# Altium PCB WikiToy.PcbDoc
Units mm, origin at the board's own origin, x right, y up, seen from the top; angles counter-clockwise.
Board outline 99.96 x 99.96 mm, 2 copper layers (Top Layer, Bottom Layer); 1 components, 0 nets, 39 pads, 0 vias.
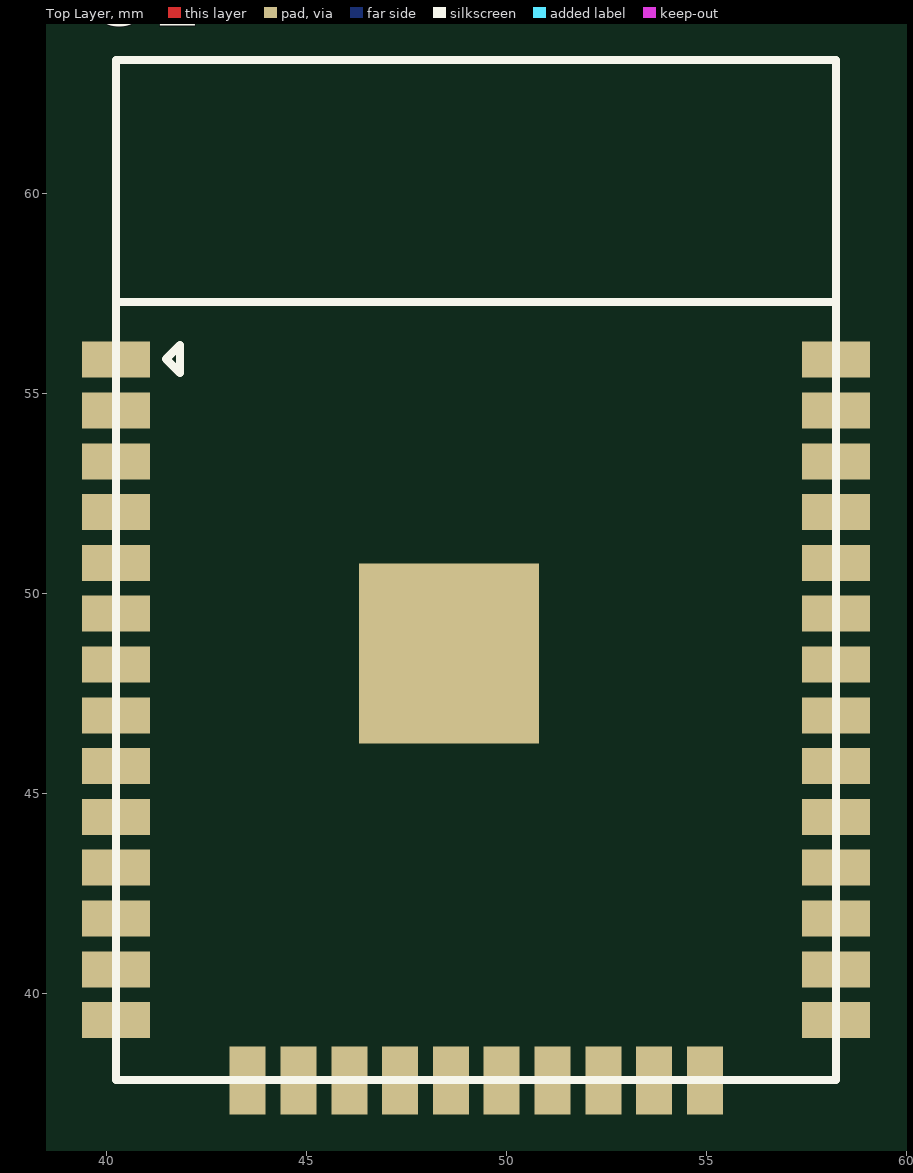
[diagram p0: Top Layer view]
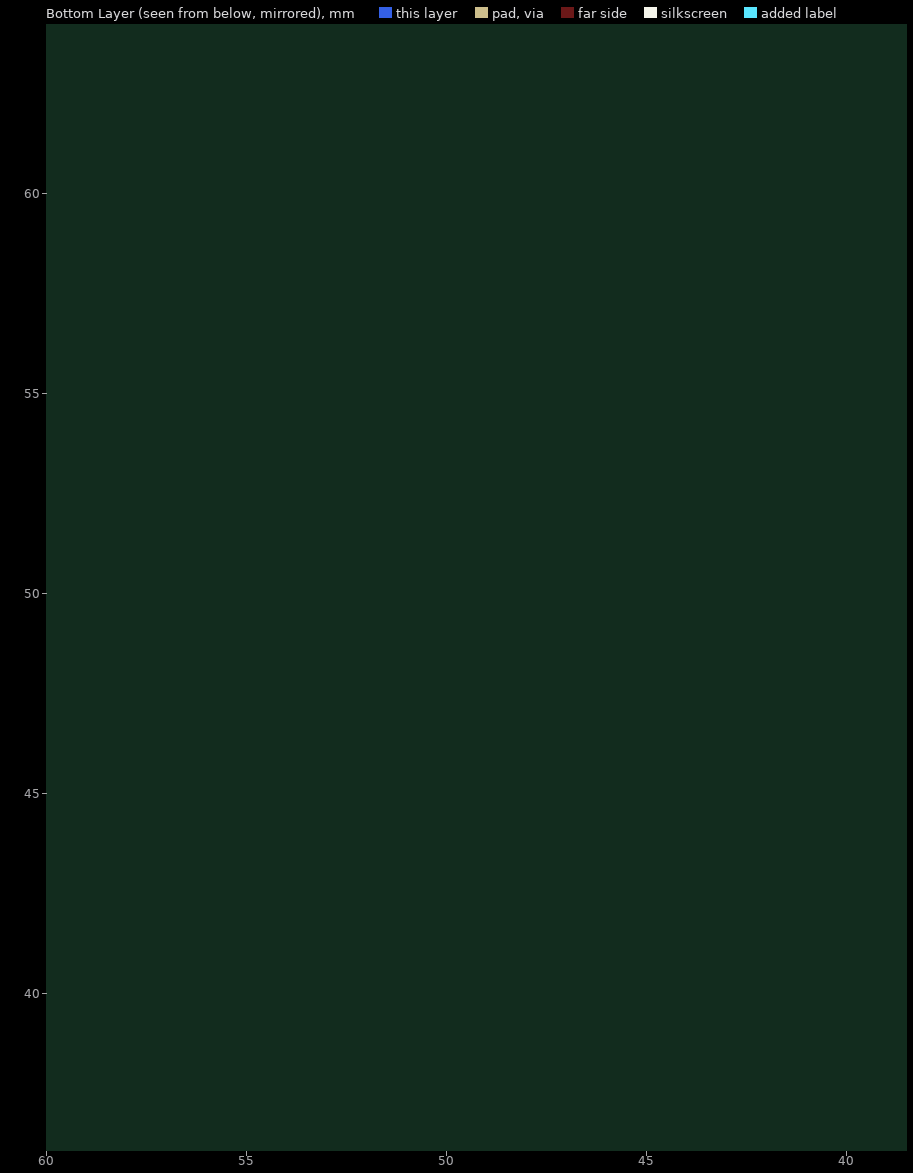
[diagram p1: Bottom Layer view, seen from below]

## Layer stack, top to bottom
Top Solder: solder mask 0.0102, Solder Resist, Dk 3.5
Top Layer: signal copper 0.0356
Dielectric 1: dielectric 0.32, FR-4, Dk 4.8
Bottom Layer: signal copper 0.0356
Bottom Solder: solder mask 0.0102, Solder Resist, Dk 3.5

## Board outline
49.727,0.189 cw(c49.727,50.171) -0.255,50.171 cw(c49.727,50.171) 49.727,100.153 cw(c49.727,50.171) 99.709,50.171 cw(c49.727,50.171)

## Design rules (kind name [scope] priority, off if disabled: settings)
Clearance [All] p1: gap=0.254
PolygonConnect [All] p1: connectstyle=Relief reliefconductorwidth=0.254 reliefentries=4 polygonreliefangle="90 Angle" airgapwidth=0.254
RoomDefinition WikiToy [InComponentClass('WikiToy')] p1: confinementstyle=ConfineIn formatcopy=TRUE lockcomponents=FALSE outline 49.727,0.189 cw(c49.727,50.171) -0.255,50.171 cw(c49.727,50.171) 49.727,100.153 cw(c49.727,50.171) 99.709,50.171 cw(c49.727,50.171)
RoutingVias [All] p1: holewidth=0.711 width=1.27 viastyle="Through Hole" minholewidth=0.711 minwidth=1.27 maxholewidth=0.711 maxwidth=1.27
SolderMaskExpansion [All] p1: expansion=0.102
Width [All] p1: maxlimit=0.254 minlimit=0.254 preferedwidth=0.254
30 further rules are at their usual default settings.

## Components (designator, comment, footprint, x,y, rotation, side; value= is the part's Value field where it differs from the comment)
U1 "ESP-32S Wi-Fi Module" ESP-32S 48.26,49.911 r0 top

## Footprints (in the part's own frame and the unit in brackets; to place one, negate y for a bottom-side part, rotate by r counter-clockwise, add the part's x,y. Pads: shape width x height; smd on the part's side, far side on the other; paste and mask are expansions set on the pad)
ESP-32S [mm]
  rect 1.7x0.9 smd: 1(-8.009,5.937) 2(-8.009,4.667) 3(-8.009,3.397) 4(-8.009,2.127) 5(-8.009,0.857) 6(-8.009,-0.413) 7(-8.009,-1.683) 8(-8.009,-2.953) 9(-8.009,-4.223) 10(-8.009,-5.493) 11(-8.009,-6.763) 12(-8.009,-8.033) 13(-8.009,-9.303) 14(-8.009,-10.573) 25(9.991,-10.573) 26(9.991,-9.303) 27(9.991,-8.033) 28(9.991,-6.763) 29(9.991,-5.493) 30(9.991,-4.223) 31(9.991,-2.953) 32(9.991,-1.683) 33(9.991,-0.413) 34(9.991,0.857) 35(9.991,2.127) 36(9.991,3.397) 37(9.991,4.667) 38(9.991,5.937)
  rect 0.9x1.7 smd: 15(-4.719,-12.083) 16(-3.449,-12.083) 17(-2.179,-12.083) 18(-0.909,-12.083) 19(0.361,-12.083) 20(1.631,-12.083) 21(2.901,-12.083) 22(4.171,-12.083) 23(5.441,-12.083) 24(6.711,-12.083)
  rect 4.5x4.5 smd: 39(0.311,-1.403)
  silkscreen extent -8.01,-12.07 9.99,13.43

## Part data
U1: library part ESP-32S

## Nets (pads, with @x,y where several pads share a name; then routed paths per layer and width w, separated by ;. In a path a pad name is that pad's centre, name@x,y a point inside that pad or via, vN(x,y) a via of type N, cw(c..) or ccw(c..) an arc to the next point about the centre after c; other vN are vias at no path point)
pads on no net: U1.1 U1.2 U1.3 U1.4 U1.5 U1.6 U1.7 U1.8 U1.9 U1.10 U1.11 U1.12 U1.13 U1.14 U1.15 U1.16 U1.17 U1.18 U1.19 U1.20 U1.21 U1.22 U1.23 U1.24 U1.25 U1.26 U1.27 U1.28 U1.29 U1.30 U1.31 U1.32 U1.33 U1.34 U1.35 U1.36 U1.37 U1.38 U1.39

## Keep-outs
Keep-Out Layer:
  circle w0.254: c49.727,50.171 r49.982